# EAGLE board Pangeran Antonius_Sensor (Line Follower) (EAGLE 9.6.2)
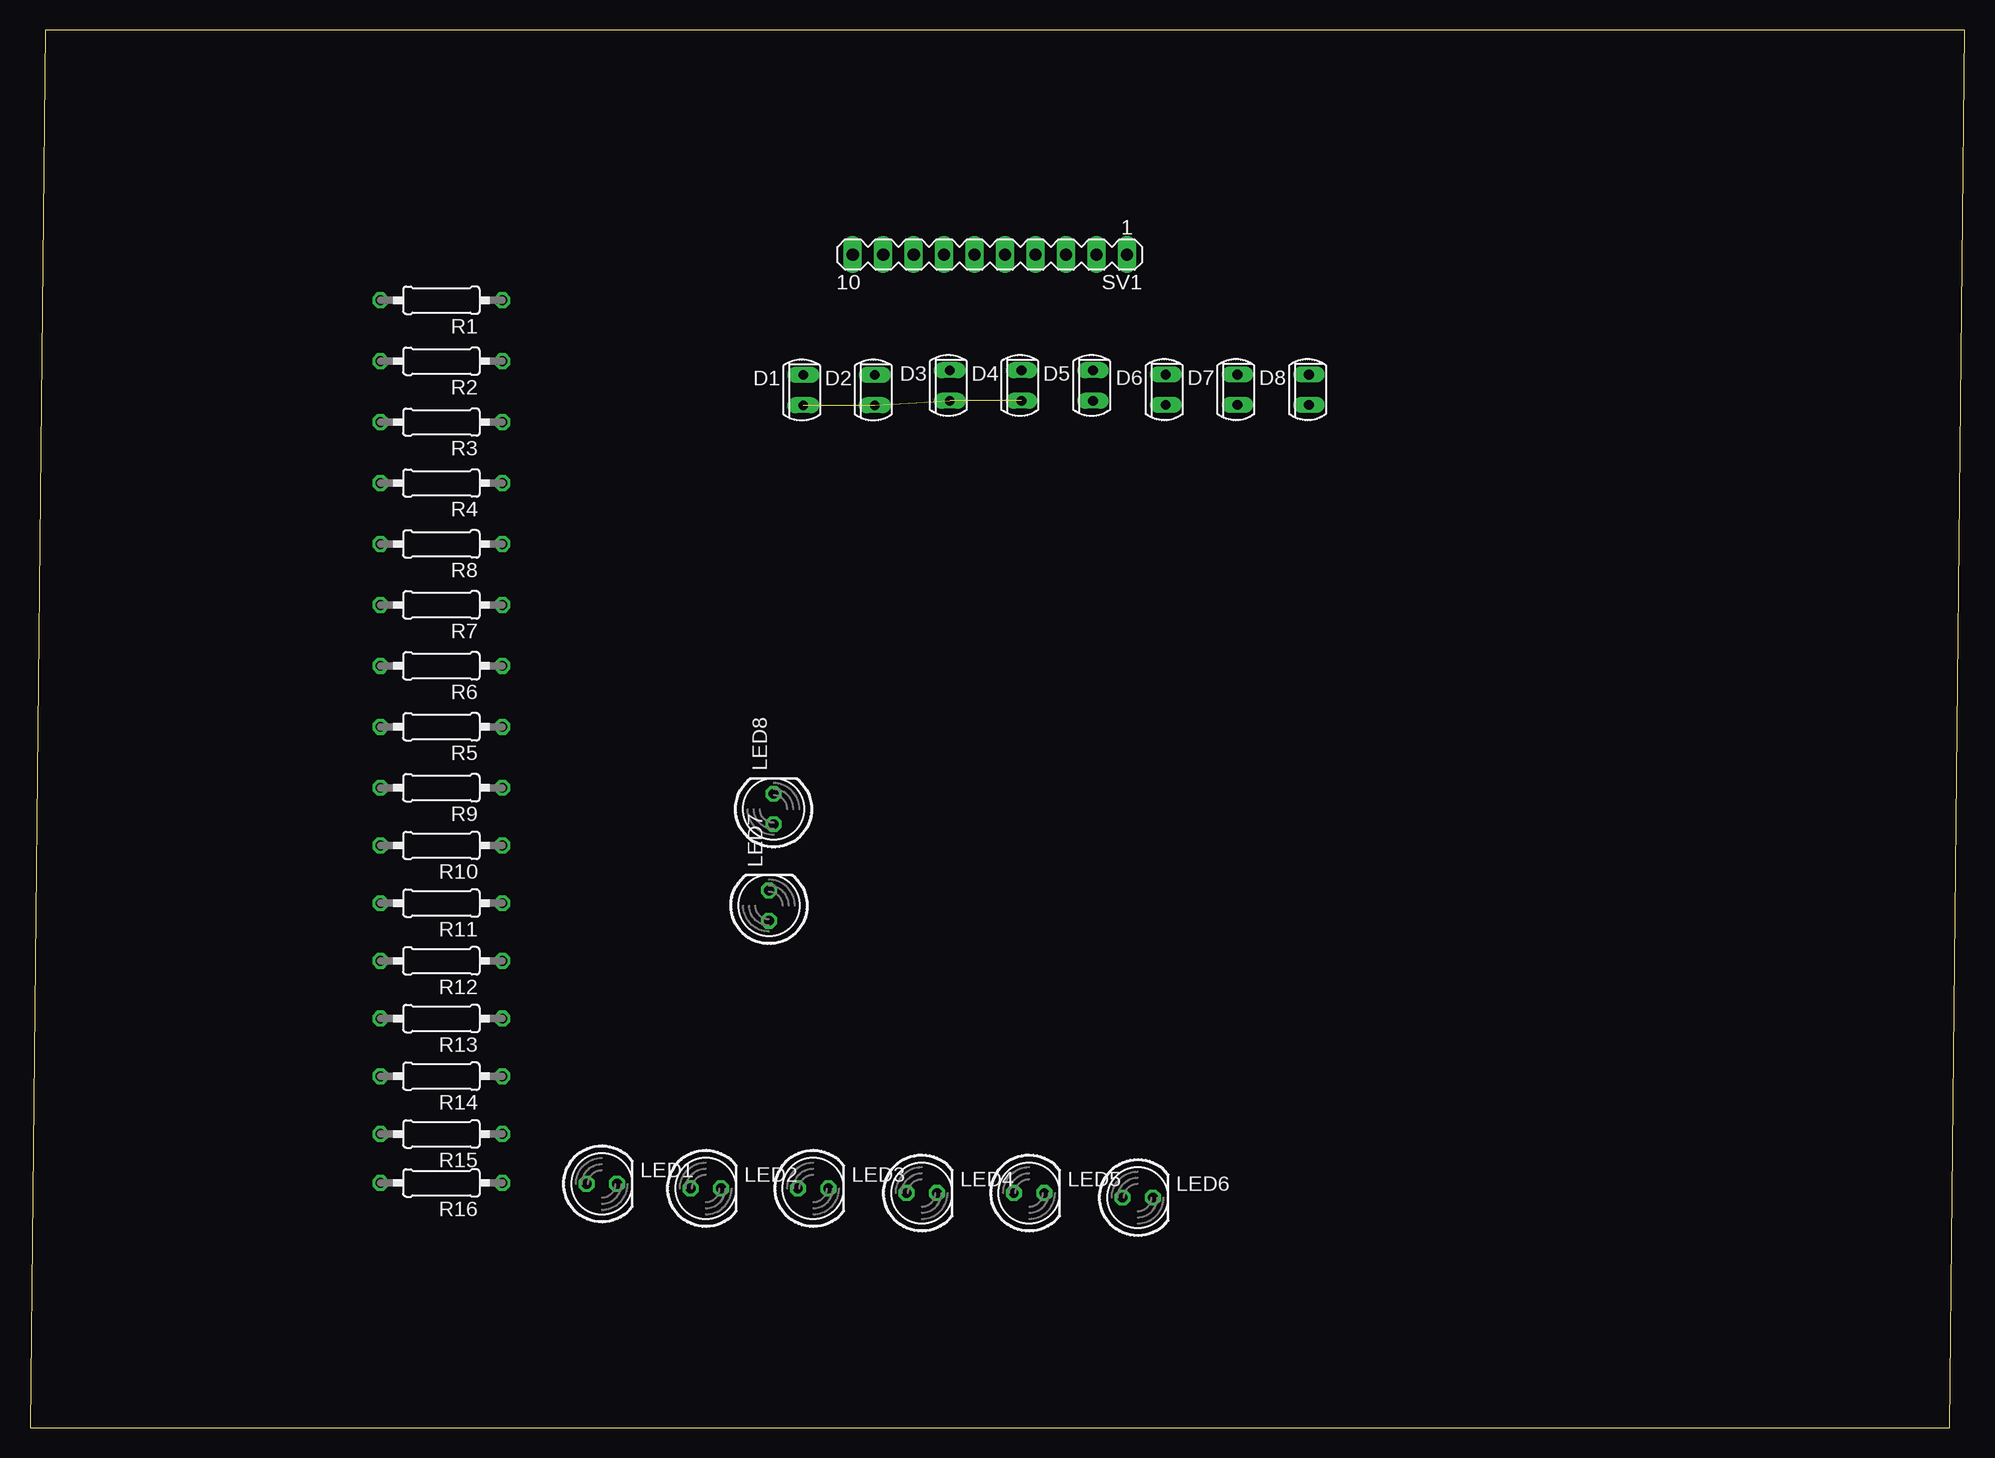
[diagram p0: board, top side]
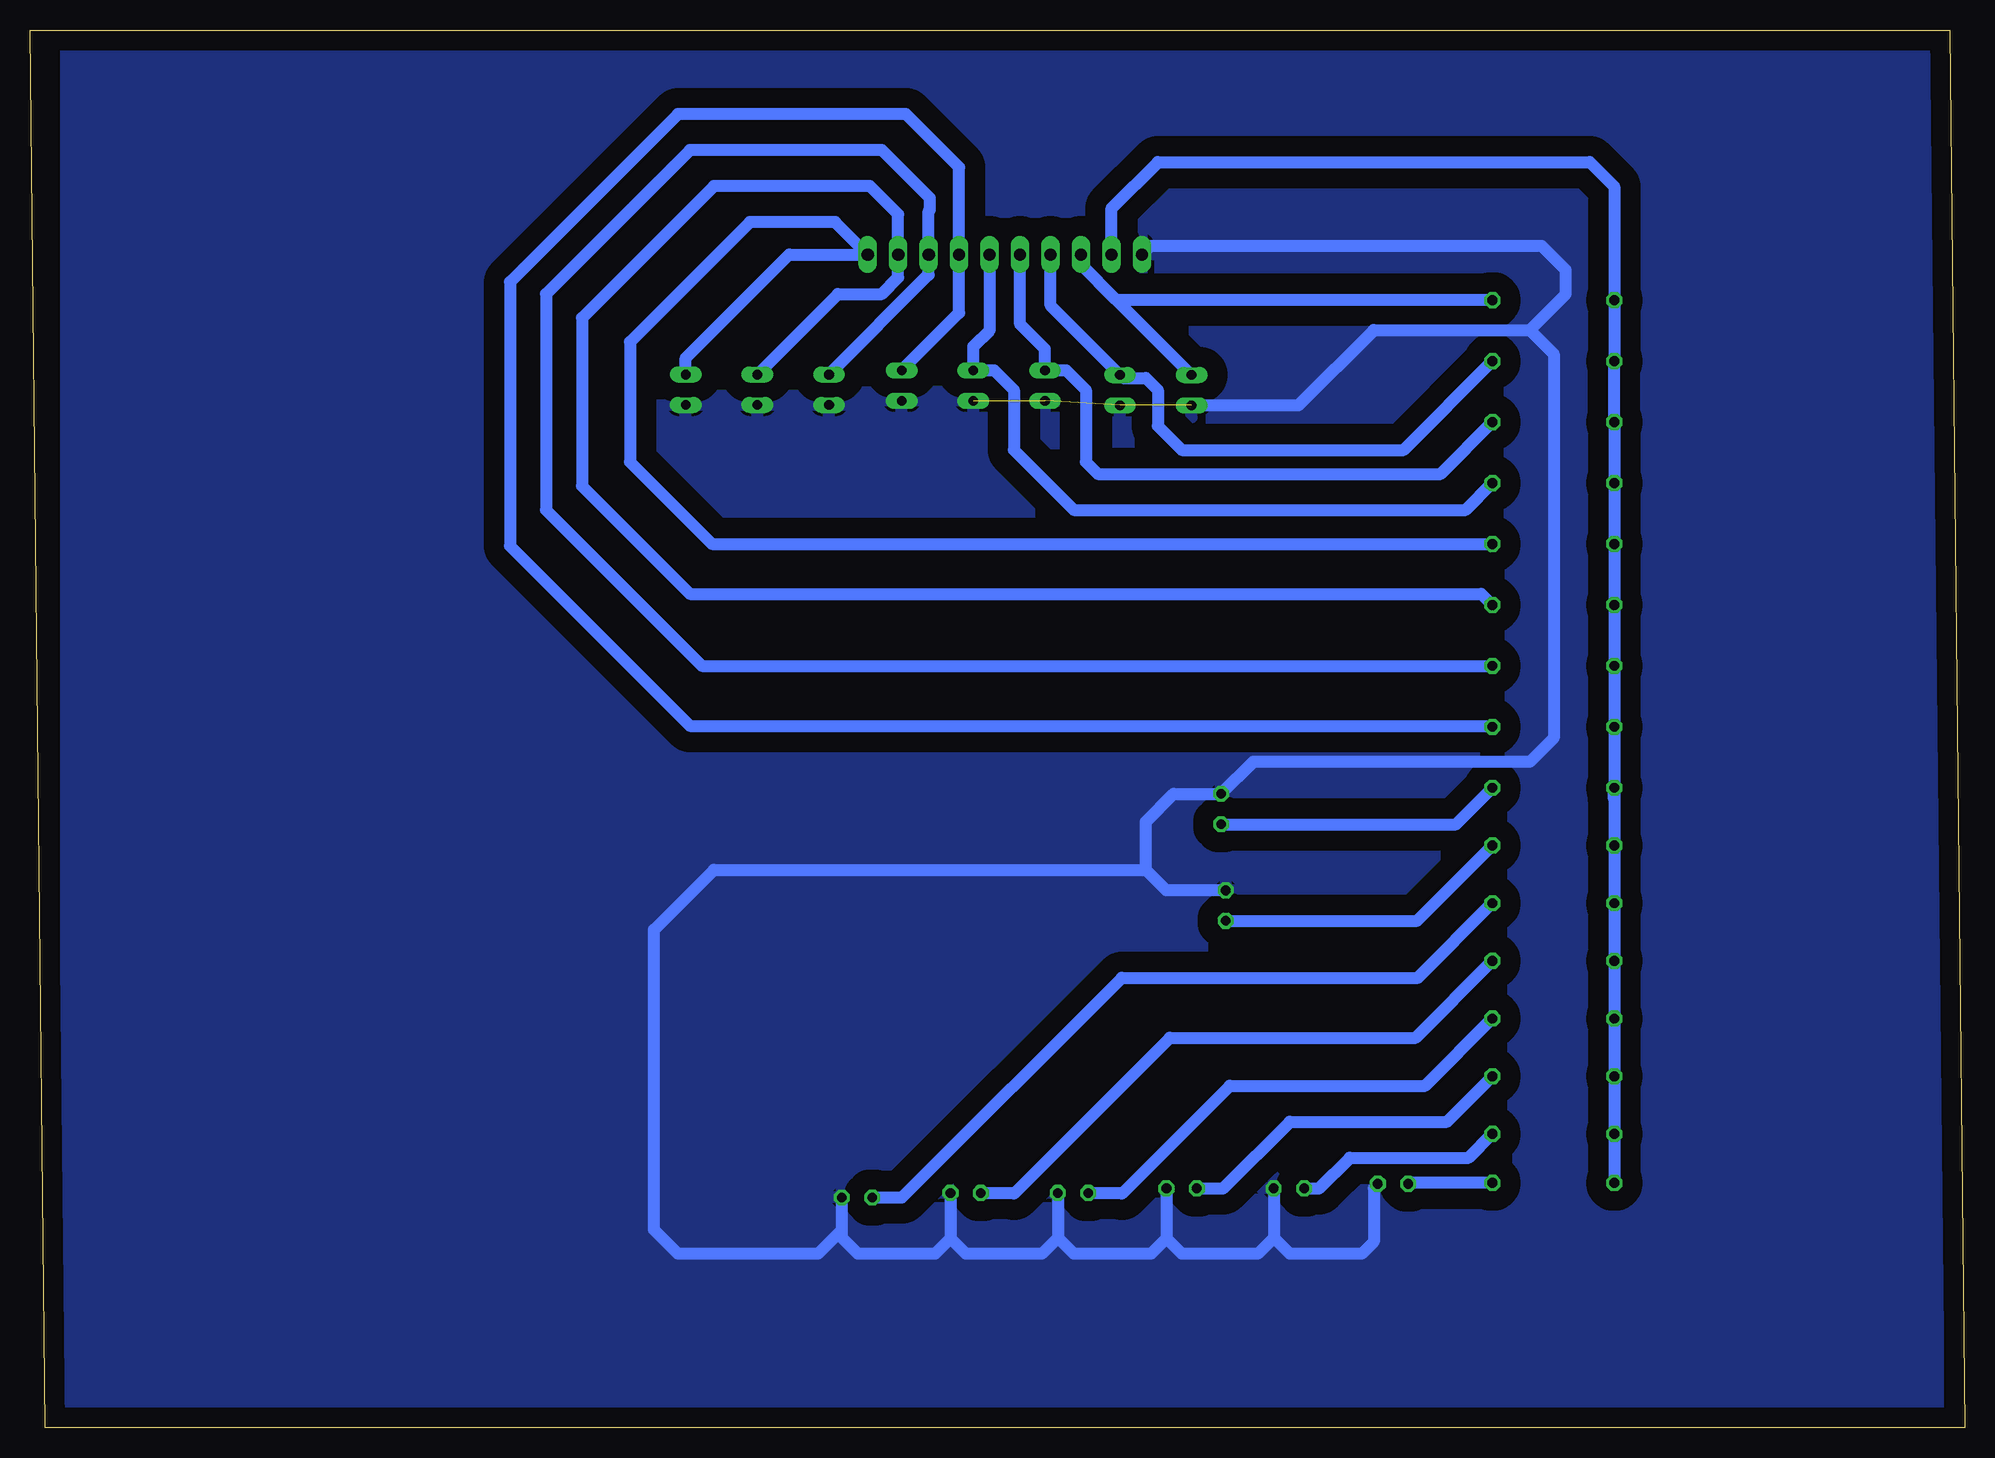
[diagram p1: board, bottom side, seen from below]

Size 161.27 x 116.51 mm. Coordinates in mm from the lower left corner, seen from the top.
Outline: 0,0 160,0 161.27,116.51 1.27,116.51 0,0
Copper layers (1*16): Top 0.035mm / dielectric 1.5mm / Bottom 0.035mm
Design rules "default": minimum track width 6mil, minimum drill 0.35mm, track to track 6mil, track to pad 6mil, pad to pad 6mil, via to via 6mil, smd to smd 6mil, copper to edge 40mil, drill to drill 6mil, minimum pad ring 10mil, minimum via ring 8mil, stop-mask expansion 4mil, vias tented up to drill 0mil, thermal gap 10mil

## Footprints (pad centres in the part's own frame; a part is rotated, then mirrored left to right if it is on the bottom)
SFH225 = drill 0.813 long: A 0,1.27; K 0,-1.27
LED5MM = drill 0.813 octagon: A -1.27,0; K 1.27,0
0207/10 = drill 0.813 octagon: 1 -5.08,0; 2 5.08,0
MA10-1 = drill 1.016 long: 1 -11.43,0; 2 -8.89,0; 3 -6.35,0; 4 -3.81,0; 5 -1.27,0; 6 1.27,0; 7 3.81,0; 8 6.35,0; 9 8.89,0; 10 11.43,0

## Placement (x,y rotation side)
D1  PhotoDioda  [SFH225]  64.45,86.49 180 top
D2  PhotoDioda  [SFH225]  70.42,86.49 180 top
D3  PhotoDioda  [SFH225]  76.67,86.87 180 top
D4  PhotoDioda  [SFH225]  82.64,86.87 180 top
D5  PhotoDioda  [SFH225]  88.61,86.87 180 top
D6  PhotoDioda  [SFH225]  94.67,86.52 180 top
D7  PhotoDioda  [SFH225]  100.64,86.52 180 top
D8  PhotoDioda  [SFH225]  106.61,86.52 180 top
LED1  LED putih SB  [LED5MM]  47.66,20.32 0 top
LED2  LED putih SB  [LED5MM]  56.33,19.94 0 top
LED3  LED putih SB  [LED5MM]  65.28,19.94 0 top
LED4  LED putih SB  [LED5MM]  74.33,19.56 0 top
LED5  LED putih SB  [LED5MM]  83.28,19.56 0 top
LED6  LED putih SB  [LED5MM]  92.33,19.18 0 top
LED7  LED putih SB  [LED5MM]  61.6,43.52 90 top
LED8  LED putih SB  [LED5MM]  61.98,51.57 90 top
R1  [0207/10]  34.29,93.98 180 top
R2  [0207/10]  34.29,88.9 180 top
R3  [0207/10]  34.29,83.82 180 top
R4  [0207/10]  34.29,78.74 180 top
R5  [0207/10]  34.29,58.42 180 top
R6  [0207/10]  34.29,63.5 180 top
R7  [0207/10]  34.29,68.58 180 top
R8  [0207/10]  34.29,73.66 180 top
R9  330  [0207/10]  34.29,53.34 180 top
R10  330  [0207/10]  34.29,48.53 180 top
R11  330  [0207/10]  34.29,43.72 180 top
R12  330  [0207/10]  34.29,38.91 180 top
R13  330  [0207/10]  34.29,34.1 180 top
R14  330  [0207/10]  34.29,29.29 180 top
R15  330  [0207/10]  34.29,24.48 180 top
R16  330  [0207/10]  34.29,20.4 180 top
SV1  [MA10-1]  80.01,97.79 180 top

## Library data of the parts
D1-D8 = opto-trans-siemens
LED1-LED8 = led
R1-R16 = resistor
SV1 = con-lstb

## Nets
GND: D1.A D2.A D3.A D4.A D5.A D6.A D7.A D8.A LED1.K LED2.K LED3.K LED4.K LED5.K LED6.K LED7.K LED8.K SV1.10
N$1: LED7.A R10.1
N$2: D7.K R7.1 SV1.2
N$3: D8.K R8.1 SV1.1
N$4: D1.K R1.1 SV1.8
N$5: D2.K R2.1 SV1.7
N$6: D3.K R3.1 SV1.6
N$7: D5.K R5.1 SV1.4
N$8: D4.K R4.1 SV1.5
N$9: D6.K R6.1 SV1.3
N$10: LED6.A R11.1
N$11: LED5.A R12.1
N$12: LED4.A R13.1
N$13: LED3.A R14.1
N$14: LED2.A R15.1
N$15: LED1.A R16.1
N$16: LED8.A R9.1
VCC: R1.2 R2.2 R3.2 R4.2 R5.2 R6.2 R7.2 R8.2 R9.2 R10.2 R11.2 R12.2 R13.2 R14.2 R15.2 R16.2 SV1.9

## Tracks (layer width: path | path; a pad name or v marks a point on that pad's centre or on a via)
GND  (3 unrouted)
  Bottom 1.016: LED1.K 49.27,19.98 49.27,15.51 50.27,14.51 56.27,14.51 57.6,15.84 | LED2.K 57.6,15.84 | 57.6,15.84 58.93,14.51 65.27,14.51 66.55,15.79 | LED3.K 66.55,15.79 | 66.55,15.79 67.83,14.51 74.27,14.51 75.6,15.84 | LED4.K 75.6,15.84 | 75.6,15.84 76.93,14.51 83.27,14.51 84.55,15.79 | LED5.K 84.55,15.79 | 84.55,15.79 85.83,14.51 92.27,14.51 93.6,15.84 93.6,16.51 | 93.6,16.51 LED6.K | LED7.K 66.55,44.79 68.27,46.51 | 68.27,46.51 68.27,50.51 65.94,52.84 LED8.K 59.31,55.51 36.27,55.51 34.27,57.51 34.27,89.51 36.27,91.51 | 93.6,16.51 95.6,14.51 107.27,14.51 109.27,16.51 109.27,41.51 104.27,46.51 68.27,46.51 | D1.A 55.56,85.22 49.27,91.51 36.27,91.51 | 36.27,91.51 33.27,94.51 33.27,96.51 35.27,98.51 67.86,98.51 SV1.10
  pour Bottom (isolate 1.676): 2.27,116.51 2.27,1.51 1.27,0.51 157.27,0.51 158.27,1.51 158.27,115.51 159.27,116.51 4.27,116.51 3.27,115.51
N$1
  Bottom 1.016: LED7.A 45.65,42.25 R10.1
N$2
  Bottom 1.016: R7.1 40.3,69.51 106.27,69.51 115.27,78.51 115.27,92.51 104.27,103.51 91.27,103.51 88.9,101.14 SV1.2 88.9,95.88 90.27,94.51 93.92,94.51 D7.K
N$3
  Bottom 1.016: R8.1 104.42,73.66 111.27,80.51 111.27,90.51 101.27,100.51 94.16,100.51 SV1.1 97.99,97.79 106.61,89.17 D8.K
N$4
  Bottom 1.016: D1.K 70.73,94.05 | 70.73,94.05 73.66,96.97 SV1.8 | 70.73,94.05 39.44,94.05 R1.1
N$5
  Bottom 1.016: SV1.7 76.2,93.54 D2.K 70.17,87.51 68.27,87.51 67.27,86.51 67.27,83.51 65.27,81.51 46.76,81.51 R2.1
N$6
  Bottom 1.016: SV1.6 78.74,91.98 76.67,89.91 D3.K 74.9,88.14 73.27,86.51 73.27,80.51 72.27,79.51 43.68,79.51 R3.1
N$7
  Bottom 1.016: R5.1 39.46,58.51 106.27,58.51 121.27,73.51 121.27,95.51 107.27,109.51 88.27,109.51 83.82,105.06 SV1.4 83.82,92.93 D5.K
N$8
  Bottom 1.016: SV1.5 81.27,91.51 82.64,90.14 D4.K 80.9,88.14 79.27,86.51 79.27,81.51 74.27,76.51 41.6,76.51 R4.1
N$9
  Bottom 1.016: R6.1 39.28,63.5 39.27,63.51 105.27,63.51 118.27,76.51 118.27,94.51 106.27,106.51 90.27,106.51 86.27,102.51 86.27,101.51 86.36,101.42 SV1.3 86.36,96.1 D6.K
N$10
  Bottom 1.016: LED6.A 88.6,19.18 70.27,37.51 45.58,37.51 R11.1
N$11
  Bottom 1.016: LED5.A 79.32,19.56 79.27,19.51 66.27,32.51 45.77,32.51 R12.1
N$12
  Bottom 1.016: LED4.A 70.32,19.56 70.27,19.51 61.27,28.51 44.96,28.51 R13.1
N$13
  Bottom 1.016: LED3.A 61.84,19.94 56.27,25.51 43.15,25.51 R14.1
N$14
  Bottom 1.016: LED2.A 53.84,19.94 51.27,22.51 41.34,22.51 R15.1
N$15
  Bottom 1.016: R16.1 46.31,20.4 LED1.A
N$16
  Bottom 1.016: LED8.A 42.41,50.3 R9.1
VCC
  Bottom 1.016: R9.2 R5.2 R6.2 R7.2 R8.2 R4.2 R3.2 29.27,83.88 29.27,88.84 R2.2 R1.2 29.21,103.45 31.27,105.51 67.27,105.51 71.12,101.66 SV1.9 | R9.2 29.21,52.57 29.27,52.51 29.27,53.28 R9.2 | R9.2 R10.2 R11.2 R12.2 R13.2 R14.2 R15.2 R16.2